# Altium PCB Light Board.PcbDoc
Units mil, origin at the board's own origin, x right, y up, seen from the top; angles counter-clockwise.
Board outline 2610.03 x 1710.03 mil, 2 copper layers (L1, L2), stack 62.8 mil thick; 13 components, 26 nets, 106 pads, 4 vias.
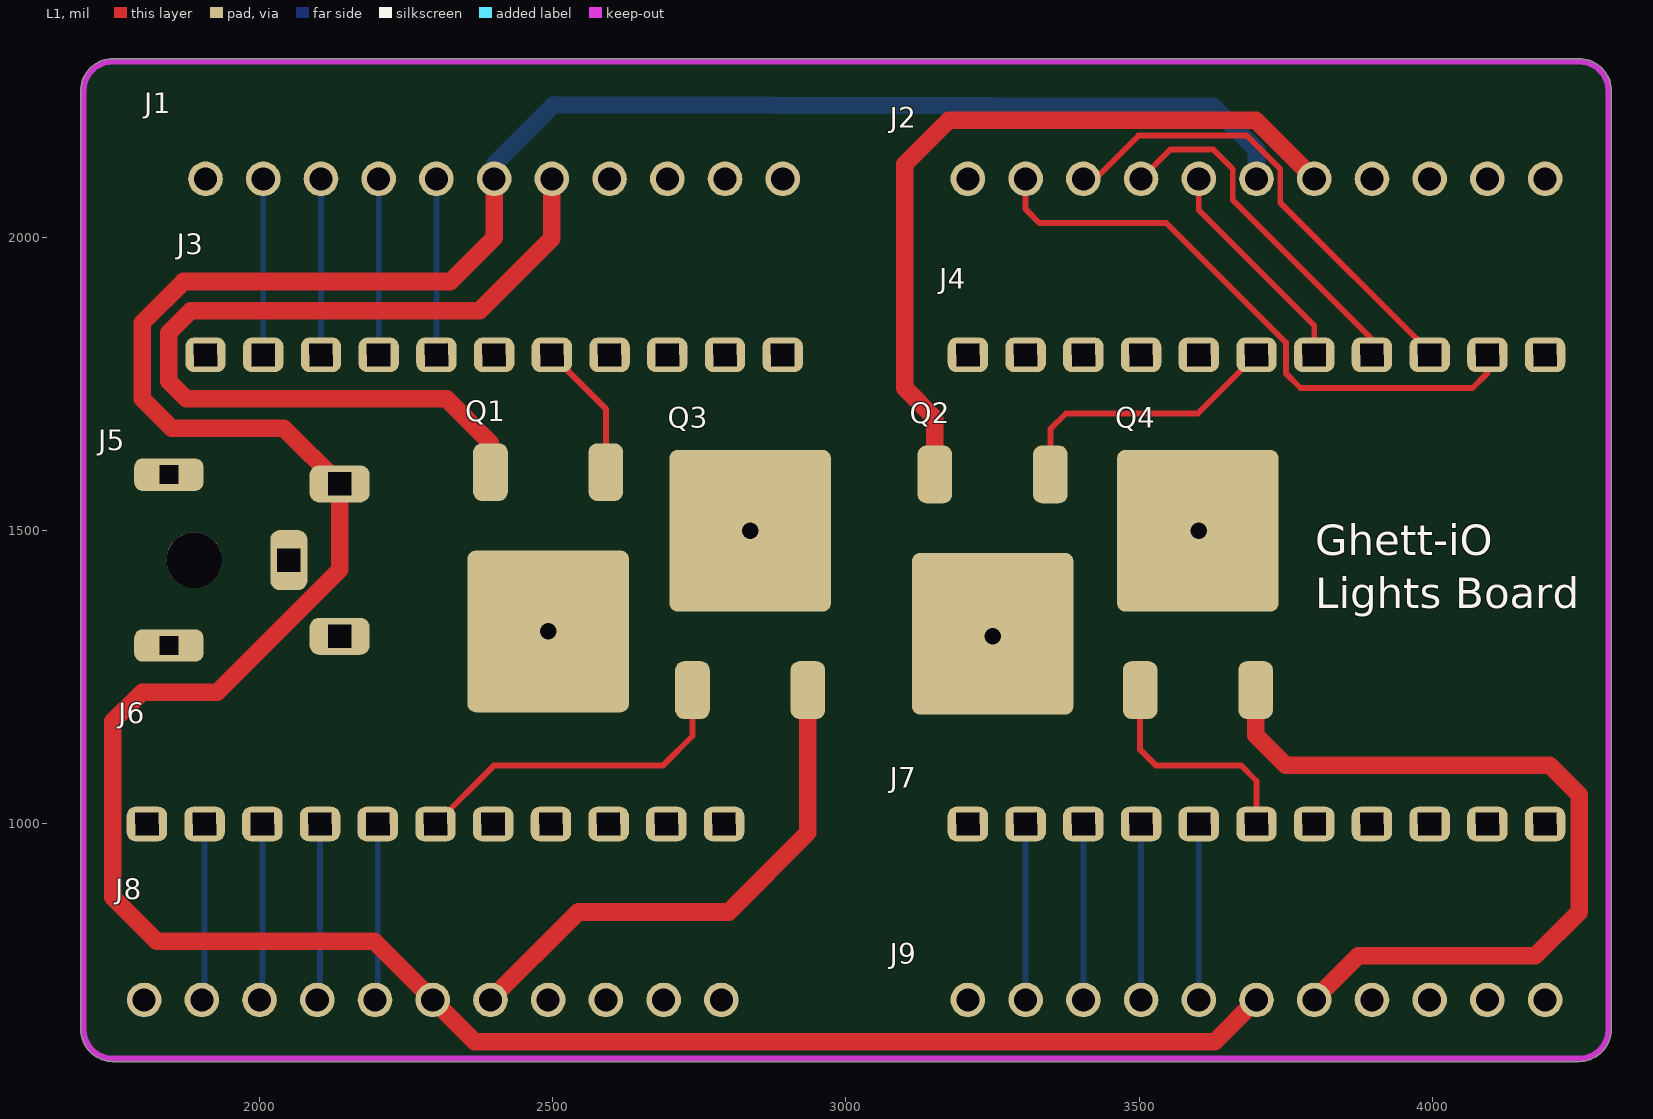
[diagram p0: L1 view]
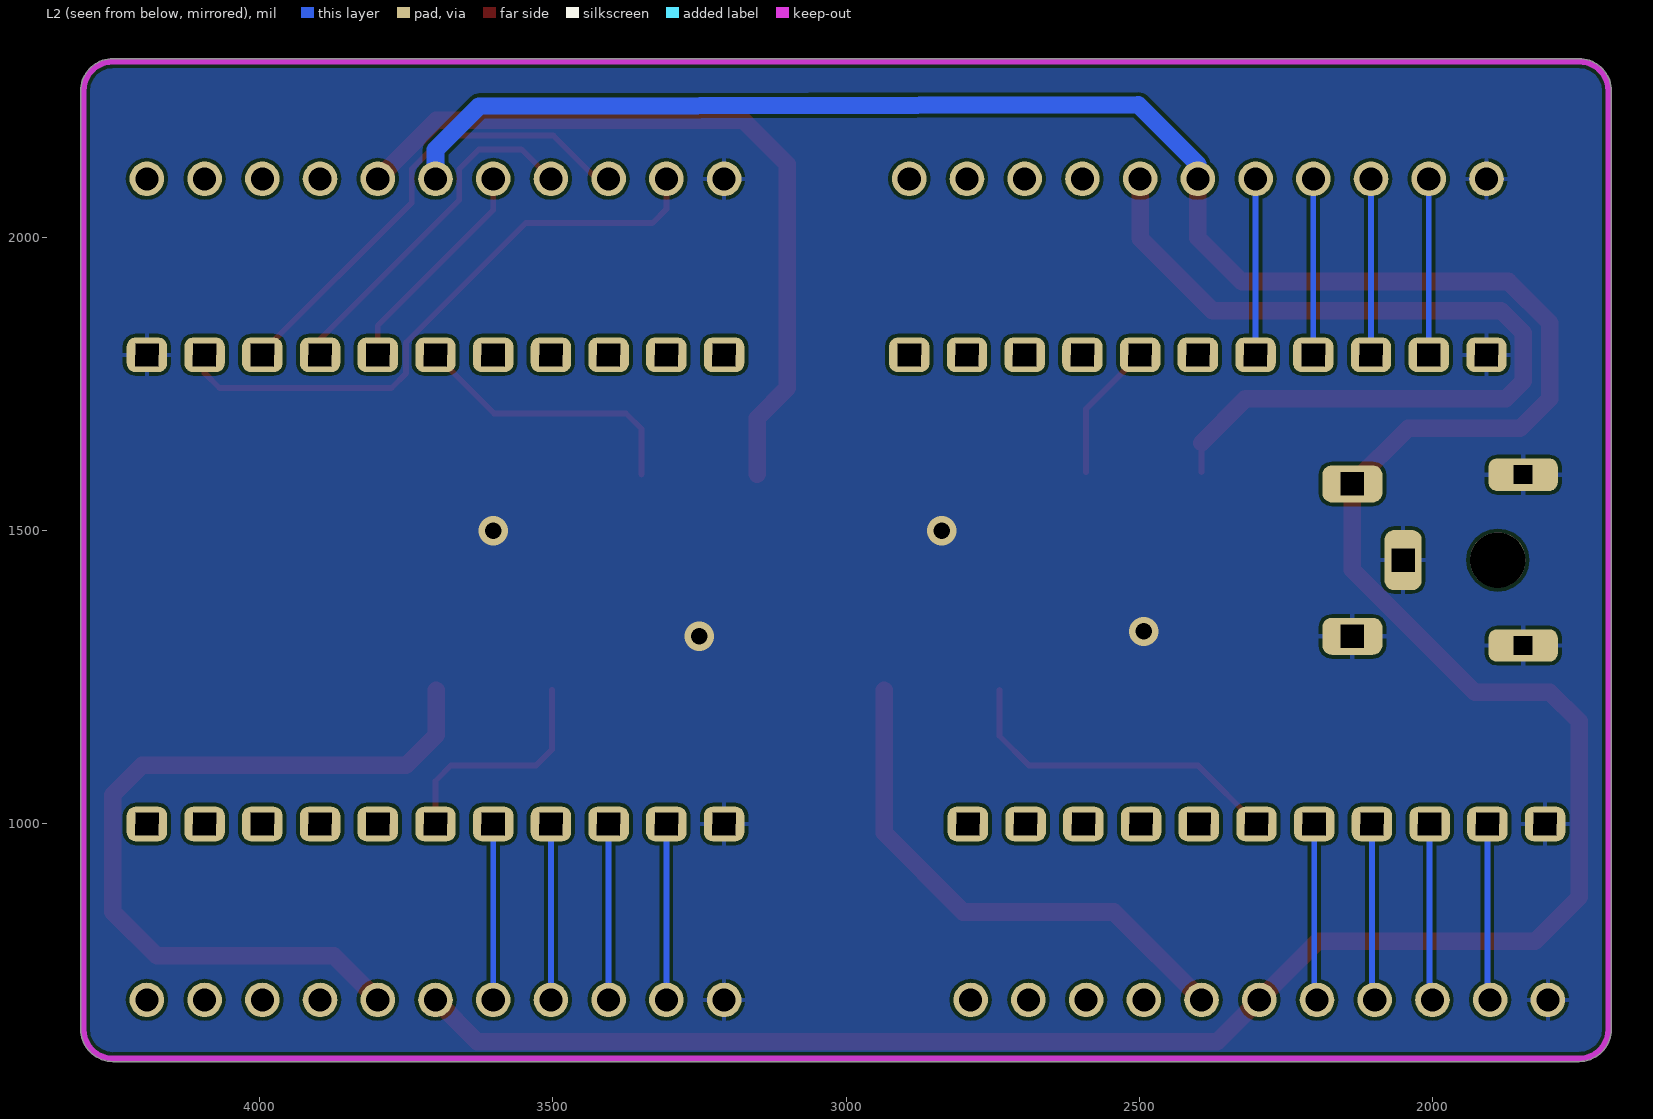
[diagram p1: L2 view, seen from below]
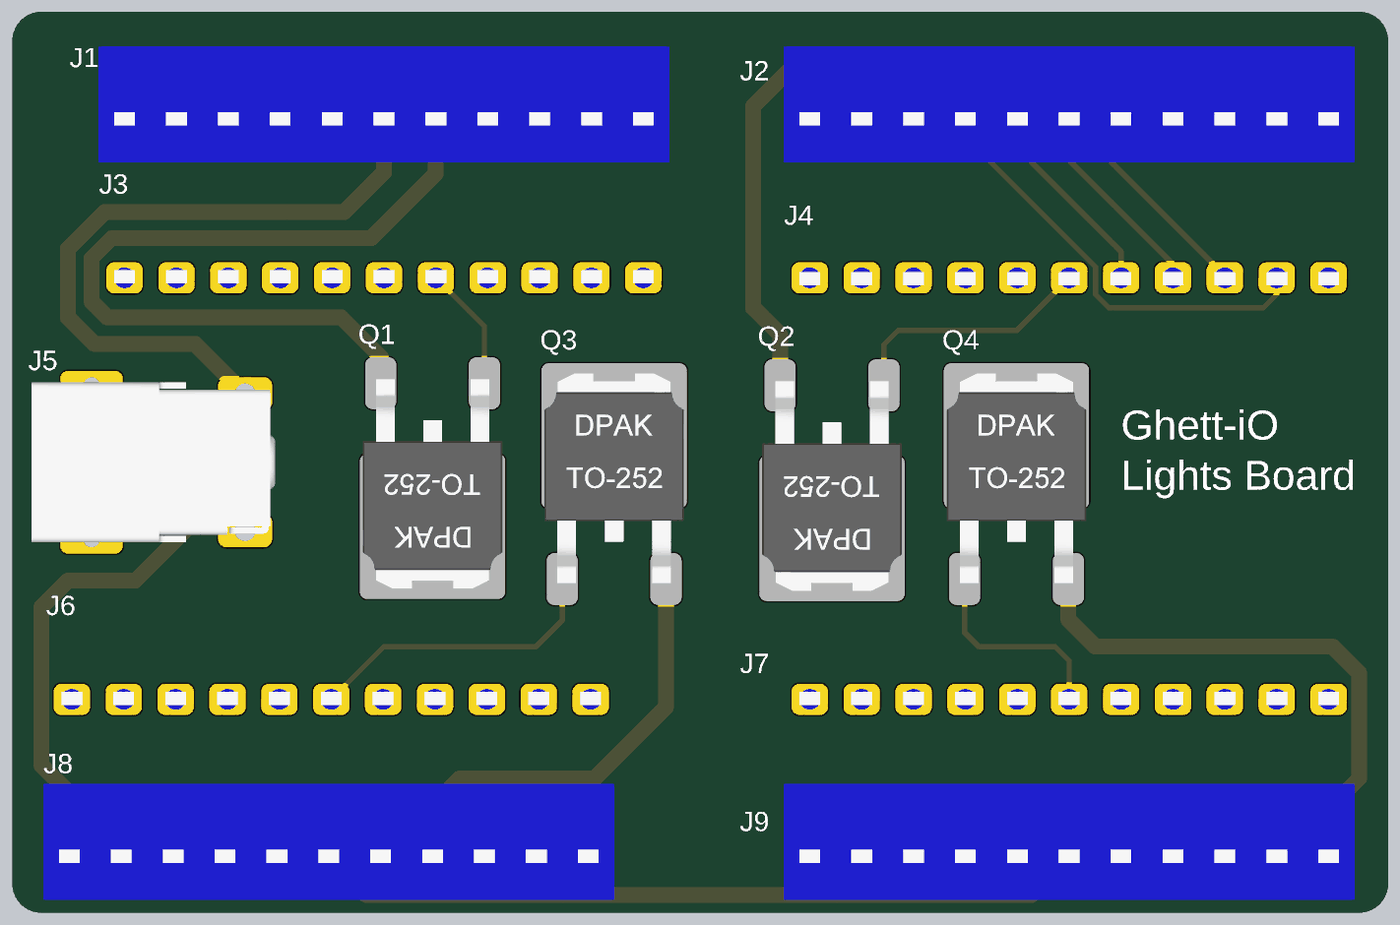
[diagram p2: 3D render of the assembled board from above, using the file's embedded part models]

## Layer stack, top to bottom
Top Solder: solder mask 0.1, Solder Resist, Dk 0
L1: signal copper 1.4
Core: dielectric 60, FR-4, Dk 4.6
L2: signal copper 1.4
Bottom Solder: solder mask 0.1, Solder Resist, Dk 0

## Board outline
1694.98,650 ccw(c1750,650) 1749.97,594.98 ccw(c1750,650) 1750,594.98 2203.15,594.98 4250,594.99 ccw(c4250,650) 4305.02,650 4305.02,2250 ccw(c4250,2250) 4250,2305.01 1750,2305.01 ccw(c1750,2250) 1694.98,2250

## Design rules (kind name [scope] priority, off if disabled: settings)
BoardOutlineClearance [All] p1: gap=15 ignorepadtopadclearanceinfootprint=FALSE
Clearance [All] p1: gap=6 ignorepadtopadclearanceinfootprint=FALSE except(0: Arc-Hole Track-Hole SMDPad-Hole THPad-Hole Via-Hole Fill-Hole Poly-Hole Region-Hole Text-Hole)
ComponentClearance [All] p1: gap=1 collisioncheckmode=3 verticalgap=1 showdistances=FALSE
DiffPairsRouting [All] p1: maxlimit=393.7 minlimit=6 mostfreqgap=8 toplayer_minwidth=6 toplayer_maxwidth=15 toplayer_prefwidth=8 bottomlayer_minwidth=6 bottomlayer_maxwidth=15 bottomlayer_prefwidth=8 maxuncoupledlength=500
HoleSize [All] p1: absolutevalues=TRUE maxlimit=265 minlimit=10 maxpercent=80.000 minpercent=20.000
HoleToHoleClearance [All] p1: gap=10 allowstackedmicrovias=FALSE
MinimumAnnularRing [All] p1: minimumring=5
MinimumSolderMaskSliver [All] p1: minsoldermaskwidth=0
PlaneClearance [All] p1: clearance=10
PlaneConnect [All] p1: planeconnectstyle=Direct reliefexpansion=16 reliefentries=4 reliefconductorwidth=6 reliefairgap=6
PolygonConnect [IsVia] p1: connectstyle=Direct reliefconductorwidth=8 reliefentries=4 polygonreliefangle="90 Angle" airgapwidth=6
PolygonConnect PolygonConnect_1 [All] p2: connectstyle=Relief reliefconductorwidth=8 reliefentries=4 polygonreliefangle="90 Angle" airgapwidth=6
RoutingCorners [All] p1: cornerstyle=45-Degree minsetback=49.21 maxsetback=49.21
RoutingVias [All] p1: holewidth=15 width=30 viastyle="Through Hole" minholewidth=13 minwidth=27 maxholewidth=100 maxwidth=114
SilkToSilkClearance [All] p1: silktosilkclearance=0
SilkToSolderMaskClearance [IsPad] p1: minsilkscreentomaskgap=6 clearancetoexposedcopper=TRUE
SolderMaskExpansion [All] p1: expansion=2.95
Width [All] p1: maxlimit=400 minlimit=6 preferedwidth=8
20 further rules are at their usual default settings.

## Components (designator, comment, footprint, x,y, rotation, side; value= is the part's Value field where it differs from the comment)
J1 "B11P-SHF-1AA" B11P-SHF-1AA 2400,2100 r0 top
J2 "B11P-SHF-1AA" B11P-SHF-1AA 3700,2100 r0 top
J3 "B11P-SHF-1AA" "B11P-SHF-1AA UNDER" 2400,1800 r0 top
J4 "B11P-SHF-1AA" "B11P-SHF-1AA UNDER" 3700,1800 r180 top
J5 "PJ-047AH" PJ-047AH 1888.58,1450 r0 top
J6 "B11P-SHF-1AA" "B11P-SHF-1AA UNDER" 2300,1000 r0 top
J7 "B11P-SHF-1AA" "B11P-SHF-1AA UNDER" 3700,1000 r0 top
J8 "B11P-SHF-1AA" B11P-SHF-1AA 2295.28,700 r0 top
J9 "B11P-SHF-1AA" B11P-SHF-1AA 3700,700 r0 top
Q1 "TSM900N06" TO-252 2492.13,1328.35 r180 top (schematic designator Q5)
Q2 "TSM900N06" TO-252 3250,1324.41 r180 top (schematic designator Q?)
Q3 "TSM900N06" TO-252 2836.62,1500 r0 top (schematic designator Q?)
Q4 "TSM900N06" TO-252 3600,1500 r0 top (schematic designator Q?)

## Footprints (in the part's own frame and the unit in brackets; to place one, negate y for a bottom-side part, rotate by r counter-clockwise, add the part's x,y. Pads: shape width x height; smd on the part's side, far side on the other; paste and mask are expansions set on the pad)
B11P-SHF-1AA [mm]
  round 1.5 hole 1: 1(-12.5,0) 2(-10,0) 3(-7.5,0) 4(-5,0) 5(-2.5,0) 6(0,0) 7(2.5,0) 8(5,0) 9(7.5,0) 10(10,0) 11(12.5,0)
  body extent -13.75,-2.05 13.75,3.55, height 9.2
"B11P-SHF-1AA UNDER" [mm]
  rrect50% 1.75x1.5 hole 1 square: 1(-12.5,0) 2(-10,0) 3(-7.5,0) 4(-5,0) 5(-2.5,0) 6(0,0) 7(2.5,0) 8(5,0) 9(7.5,0) 10(10,0) 11(12.5,0)
  body extent -13.75,-2.05 13.75,3.55, height 5.3
PJ-047AH [mm]
  rrect50% 2.6x1.6 hole 1 square: 1(6.3,-3.3) 3(6.3,3.3)
  rrect50% 1.6x2.6 hole 1 square: 2(4.1,0)
  rrect50% 3x1.4 hole 0.8 square: Shield(-1.1,-3.7) Shield(-1.1,3.7)
  round 2.4 hole 2.4 paste+0 mask+0: ""(0,0)
  body extent -4,-3.85 7.75,3.85, height 9.8
TO-252 [mm]
  rrect50% 1.5x2.5 smd: 1(-2.5,-6.9) 3(2.5,-6.9)
  rrect10% 7x7 smd: 2(0,0)
  body extent -3.37,-7.1 3.37,3, height 2.87

## Part data
J1 J2 J3 J4 J6 J7 J8 J9: Color=Natural, Current Rating=3A, Manufacturer=JST, Manufacturer Part Number=B11P-SHF-1AA(LF)(SN), Supplier Part Number 1=B11P-SHF-1AA(LF)(SN)-ND, Voltage Rating=250V, ComponentLink1Description=http://www.jst-mfg.com/product/pdf/eng/eNH.pdf?src-supplier=Digi-Key, ComponentLink1URL=http://www.jst-mfg.com/product/pdf/eng/eNH.pdf?src-supplier=Digi-Key, Connector Type="Male Pin", Contact Material=Brass, Contact Mating Length=0.236inch, Contact Plating=Tin, Fastening Type=Friction, Mount="Through Hole", Number of Contacts=11, Number of Positions=11, Number of Rows=1, Orientation=Straight, Packaging=Bulk, Pitch=0.098inch, Pricing 1="250=0.48872 (USD)", Stock 1=0, Supplier 1=Digi-Key, Termination=Solder
J5: Color=Black, Current Rating=5A, Flammability Rating="UL94 V-0", Insulation Resistance=100MR, Manufacturer=CUI, Max Operating Temperature=85°C, Min Operating Temperature=-25°C, Package Quantity=500, Supplier Part Number 1=CP-047AH-ND, Voltage Rating=24V, Connector Type=Jack, Contact Gender=Male, Contact Material=Brass,Copper, Contact Plating=Nickel, Gender=Male, Housing Color=Black, Housing Material=Thermoplastic, Lead Free="Lead Free", Manufacturer Part Number=PJ-047AH, Mount="Through Hole", Number of Conductors=2, Orientation=Horizontal, Pricing 1="1=0.8, 10=0.701, 25=0.66, 50=0.6326, 100=0.605, 250=0.55, 500=0.495, 1000=0.44, 2500=0.39875 (USD)", Shielding=Shielded, Stock 1=6714, Supplier 1=Digi-Key, Termination=Solder
Q1 Q2 Q3 Q4: Manufacturer="Taiwan Semiconductor", Manufacturer Part Number=TSM900N06CPROG, Supplier Part Number 1="TSM900N06CP ROG", Pricing 1="1=0.5174, 10=0.4387, 25=0.4341, 50=0.4294, 100=0.3242, 250=0.3207, 500=0.236, 1000=0.182, 3000=0.1809, 6000=0.179, 15000=0.177, 30000=0.175, 75000=0.1729 (USD)", Stock 1=2500, Supplier 1="Arrow Electronics Inc."

## Via types
v1: diameter 50, hole 28, L1 to L2, 4 vias

## Nets (pads, with @x,y where several pads share a name; then routed paths per layer and width w, separated by ;. In a path a pad name is that pad's centre, name@x,y a point inside that pad or via, vN(x,y) a via of type N, cw(c..) or ccw(c..) an arc to the next point about the centre after c; other vN are vias at no path point)
+12: J1.6 J2.6 J5.3 J8.6 J9.6 | length 5756.2
  L1 w10: J1.6 J1.6@2400,2125
  L1 w30: J1.6 2400,2000 2325,1925 1870.28,1925 1800,1854.72 1800,1725 1850,1675 2041.54,1675 J5.3 2136.61,1433.46 1928.15,1225 1800,1225 1750,1175 1750,875 1825,800 2195.28,800 J8.6 2366.64,628.64 3628.64,628.64 J9.6
  L2 w30: J1.6@2400,2125 2501.49,2226.49 3625.8,2224.25 3700,2150.05 J2.6
GND: J1.1 J2.1 J3.1 J4.1 J5.1 J5.2 J5.Shield J6.1 J7.1 J8.1 J9.1 Q1.2 Q2.2 Q3.2 Q4.2
  other v1: 3250,1320.08 2492.13,1328.35 2836.62,1500 3601.57,1500
NetJ1_2: J1.2 J3.2 | length 300
  L2 w10: J3.2 J1.2
NetJ1_3: J1.3 J3.3 | length 300
  L2 w10: J3.3 J1.3
NetJ1_4: J1.4 J3.4 | length 300
  L2 w10: J3.4 J1.4
NetJ1_5: J1.5 J3.5 | length 300
  L2 w10: J3.5 J1.5
NetJ1_7: J1.7 Q1.3 | length 1545.9
  L1 w10: Q1.3 2393.7,1650
  L1 w30: 2393.7,1650 2318.7,1725 1875,1725 1845.28,1754.72 1845.28,1837.4 1882.87,1875 2375,1875 2498.43,1998.43 J1.7
NetJ2_2: J2.2 J4.2 | length 1037.7
  L1 w10: J2.2 3306.3,2048.43 3329.72,2025 3545.88,2025 3750,1820.88 3750,1768.48 3775.01,1743.47 4068.47,1743.47 4093.7,1768.7 J4.2
NetJ2_3: J2.3 J4.3 | length 812.5
  L1 w10: J2.3 3425,2100 3499,2174 3683.31,2174 3740.53,2116.79 3740.53,2059.47 3995.28,1804.72 J4.3
NetJ2_4: J2.4 J4.4 | length 605.9
  L1 w10: J2.4 3553.15,2150 3626.26,2150 3659.47,2116.79 3659.47,2063.95 3896.85,1826.57 J4.4
NetJ2_5: J2.5 J4.5 | length 414.7
  L1 w10: J2.5 3601.57,2046.85 3798.43,1850 3798.43,1823.43 3775,1800 J4.5
NetJ2_7: J2.7 Q2.3 | length 1321.2
  L1 w30: Q2.3 3151.57,1691.9 3100,1743.47 3100,2125 3175,2200 3698.43,2200 J2.7
NetJ3_7: J3.7 Q1.1 | length 238.2
  L1 w10: J3.7 2590.55,1707.87 Q1.1
NetJ4_6: J4.6 Q2.1 | length 481.4
  L1 w10: Q2.1 3348.43,1673.43 3375,1700 3600,1700 J4.6
NetJ6_2: J6.2 J8.2 | length 302
  L2 w10: J8.2 1906.3,704.72 J6.2
NetJ6_3: J6.3 J8.3 | length 302
  L2 w10: J8.3 2004.72,704.72 J6.3
NetJ6_4: J6.4 J8.4 | length 302
  L2 w10: J8.4 2103.15,704.72 J6.4
NetJ6_5: J6.5 J8.5 | length 302
  L2 w10: J8.5 2201.57,704.72 J6.5
NetJ6_6: J6.6 Q3.1 | length 578.7
  L1 w10: J6.6 2400,1100 2688.19,1100 2738.19,1150 Q3.1
NetJ7_2: J7.2 J9.2 | length 300
  L2 w10: J9.2 J7.2
NetJ7_3: J7.3 J9.3 | length 300
  L2 w10: J9.3 J7.3
NetJ7_4: J7.4 J9.4 | length 300
  L2 w10: J9.4 J7.4
NetJ7_5: J7.5 J9.5 | length 300
  L2 w10: J9.5 J7.5
NetJ7_6: J7.6 Q4.1 | length 395.6
  L1 w10: Q4.1 3501.57,1126.57 3528.15,1100 3673.43,1100 3700,1073.43 J7.6
NetJ8_7: J8.7 Q3.3 | length 902.7
  L1 w30: J8.7 2543.7,850 2800,850 2935.04,985.04 Q3.3
NetJ9_7: J9.7 Q4.3 | length 1384.1
  L1 w30: Q4.3 3698.43,1151.57 3750,1100 4200,1100 4250,1050 4250,850 4175,775 3873.43,775 J9.7
pads on no net: J1.8 J1.9 J1.10 J1.11 J2.8 J2.9 J2.10 J2.11 J3.6 J3.8 J3.9 J3.10 J3.11 J4.7 J4.8 J4.9 J4.10 J4.11 J5. J6.7 J6.8 J6.9 J6.10 J6.11 J7.7 J7.8 J7.9 J7.10 J7.11 J8.8 J8.9 J8.10 J8.11 J9.8 J9.9 J9.10 J9.11

## Polygon pours and split planes (outlines as drawn)
GND on L2 "GND_L02_P000" (solid, pour order 0): 1675,2325 1700,2350 4325,2350 4325,575 1675,575

## Keep-outs
Keep-Out Layer:
  lines w10: 2196.85,600 4250,600 ccw(c4250,650) 4300,650 4300,2250 ccw(c4250,2250) 4250,2300 4241.34,2300 1750,2300 ccw(c1750,2250) 1700,2250 1700,650 ccw(c1750,650) 1750,600 ; 2203.15,600 1750,600 ; 1750,600 ccw(c1750,600) 1750,600

## Silkscreen, mask and mechanical layers (free items; w line width, h text height)
Top Overlay:
  text "Ghett-iO / Lights Board" at 3800,1350 h90